# Altium PCB PCB1.PcbDoc
Units mm, origin at the board's own origin, x right, y up, seen from the top; angles counter-clockwise.
Board outline 86 x 53 mm, 2 copper layers (Top Layer, Bottom Layer); 32 components, 26 nets, 111 pads, 0 vias.
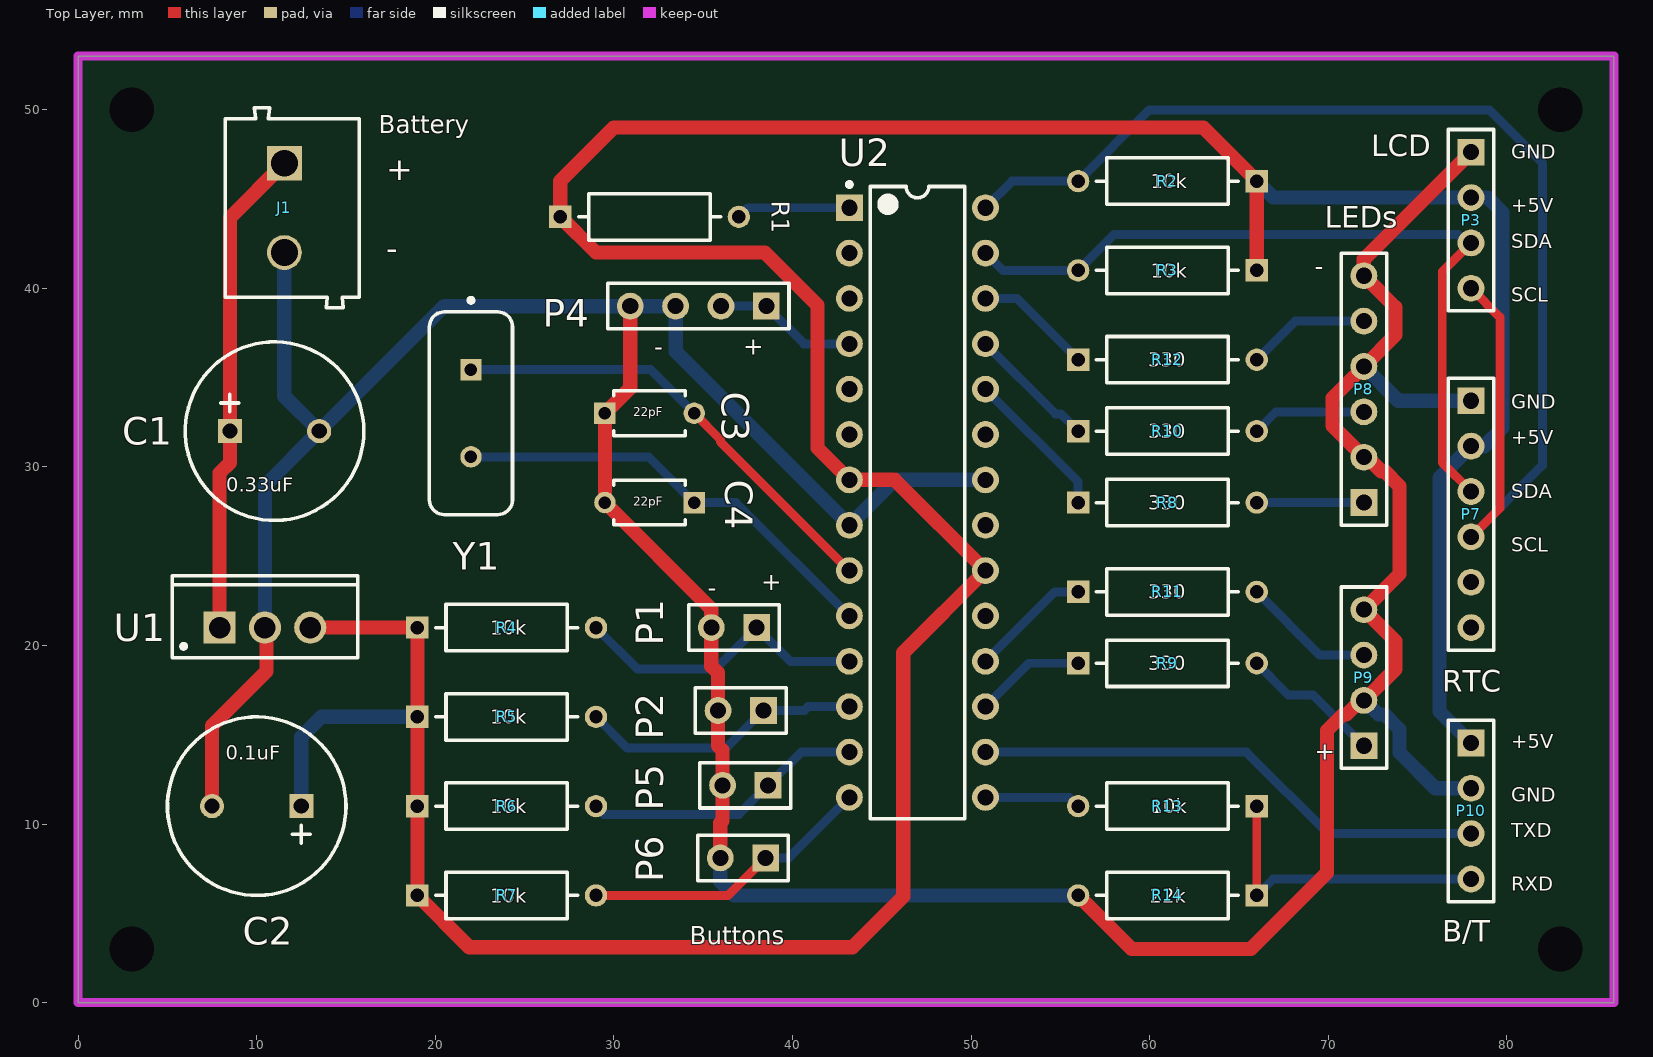
[diagram p0: Top Layer view]
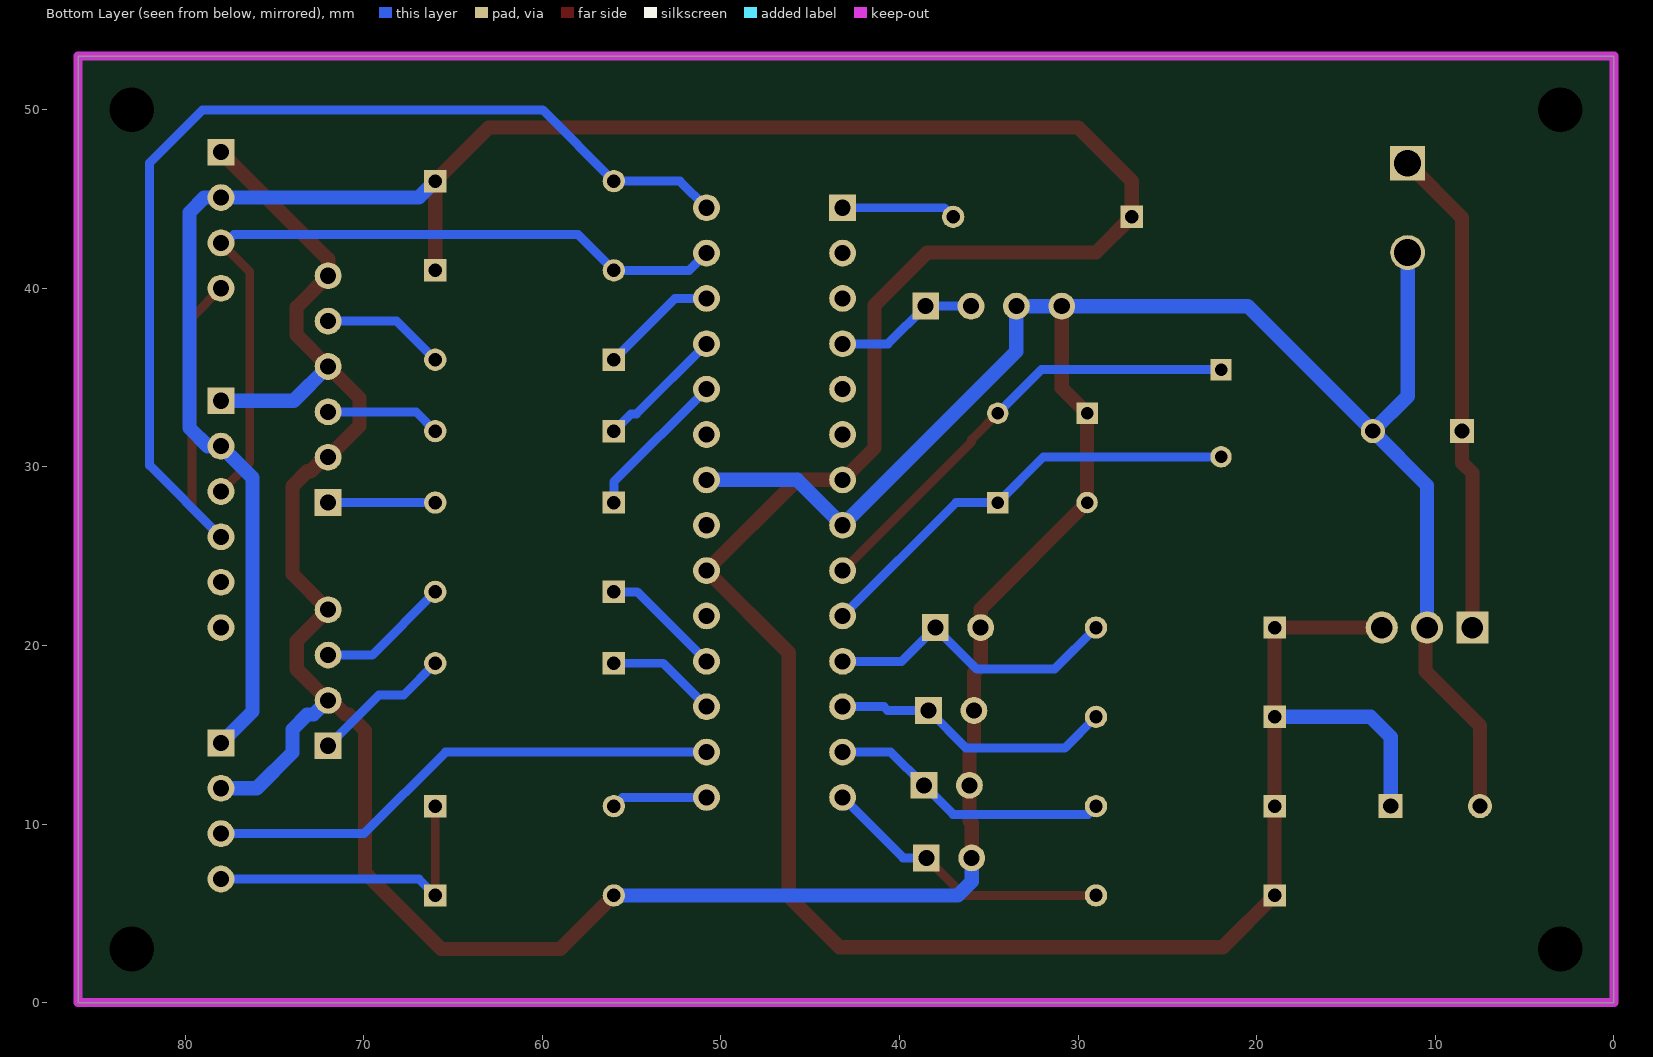
[diagram p1: Bottom Layer view, seen from below]
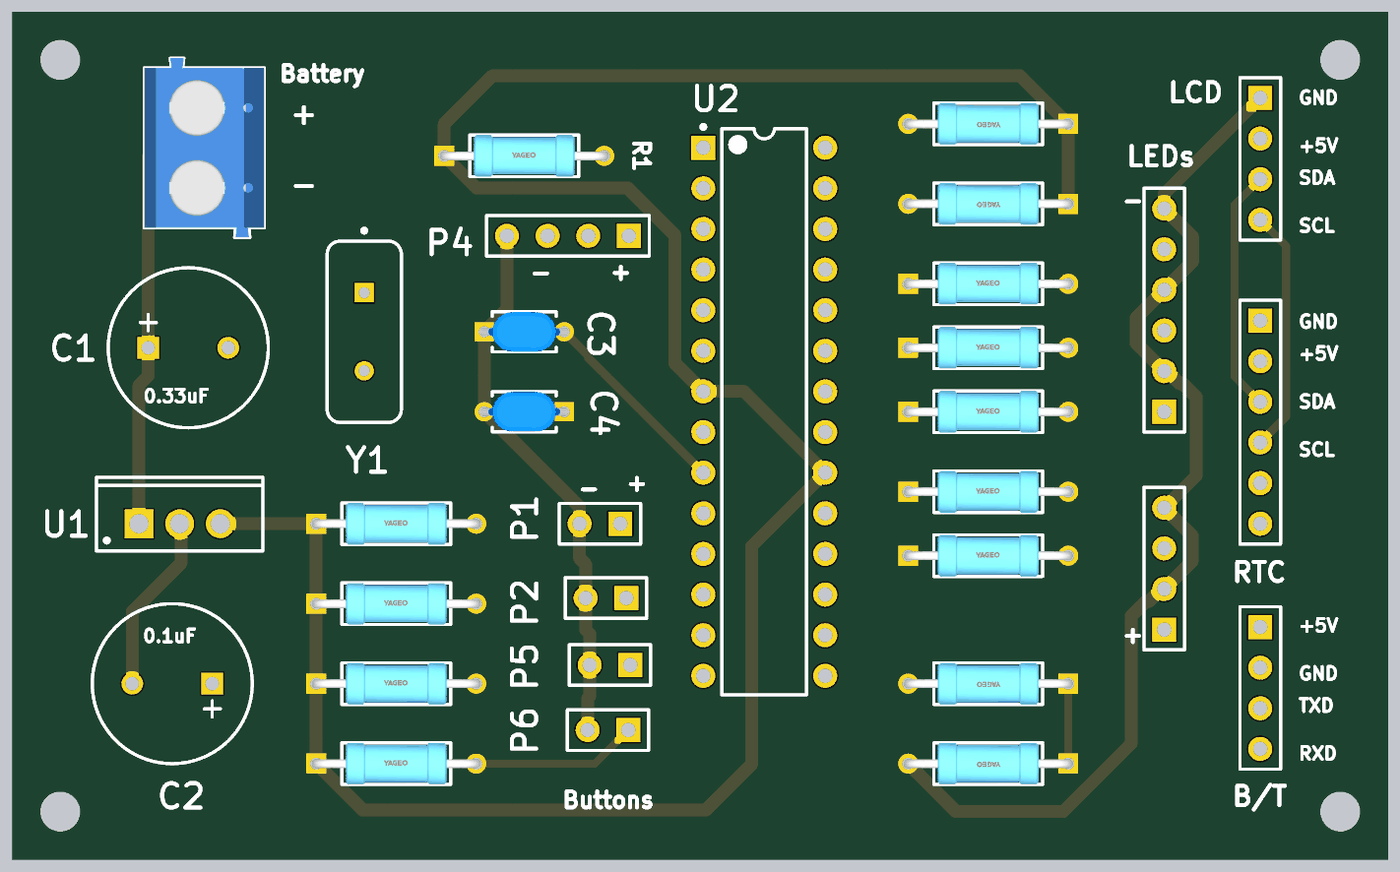
[diagram p2: 3D render of the assembled board from above, using the file's embedded part models]

## Layer stack, top to bottom
Top Solder: solder mask 0.0102, Solder Resist, Dk 3.5
Top Layer: signal copper 0.0356
Dielectric 1: dielectric 0.32, FR-4, Dk 4.8
Bottom Layer: signal copper 0.0356
Bottom Solder: solder mask 0.0102, Solder Resist, Dk 3.5

## Board outline
0,0 86,0 86,53 0,53

## Design rules (kind name [scope] priority, off if disabled: settings)
Clearance [All] p1: gap=0.6 ignorepadtopadclearanceinfootprint=FALSE
HoleSize [All] p1: absolutevalues=TRUE maxlimit=2.54 minlimit=0.7 maxpercent=80.000 minpercent=20.000
PolygonConnect [All] p1: connectstyle=Relief reliefconductorwidth=0.254 reliefentries=4 polygonreliefangle="90 Angle" airgapwidth=0.254
RoutingVias [All] p1: holewidth=0.711 width=1.27 viastyle="Through Hole" minholewidth=0.711 minwidth=1.27 maxholewidth=0.711 maxwidth=1.27
SolderMaskExpansion [All] p1: expansion=0.102 istentingtop=FALSE
Width Width_1 [InNet('+5V') or InNet('GND')] p1: maxlimit=2 minlimit=0.7 preferedwidth=0.8
Width [All] p2: maxlimit=2 minlimit=0.5 preferedwidth=0.5
29 further rules are at their usual default settings.

## Components (designator, comment, footprint, x,y, rotation, side; value= is the part's Value field where it differs from the comment)
C1 "0.33uF" NIC-PLF-10x13-2_V 11,32 r0 top
C2 "0.1uF" NIC-PLF-10x13-2_V 10,11 r180 top
C3 "22pF" FP-RDE0M1-MFG 32,33 r0 top
C4 "22pF" FP-RDE0M1-MFG 32,28 r180 top
J1 "Battery" 691102710002 12,44.5 r270 top
P1 "set_alarm button" HDR1X2 38,21 r180 top
P2 "down button" HDR1X2 38.375,16.355 r180 top
P3 "LCD" HDR1X4 78,47.62 r270 top
P4 "Buzzer" HDR1X4 38.54,39 r180 top
P5 "up button" HDR1X2 38.629,12.164 r180 top
P6 "set_time button" HDR1X2 38.502,8.1 r180 top
P7 "RTC" HDR1X6 78,33.7 r270 top
P8 "LEDs" HDR1X6 72,28 r90 top
P9 "LEDs" HDR1X4 72,14.38 r90 top
P10 "B/T" HDR1X4 78,14.54 r270 top
R1 "MFR-25FBF52-1K18" FP-MFR-25-MFG 32,44 r0 top value=10kΩ
R2 "10k" FP-MFR-25-MFG 61,46 r180 top value=10kΩ
R3 "10k" FP-MFR-25-MFG 61,41 r180 top value=10kΩ
R4 "10k" FP-MFR-25-MFG 24,21 r0 top value=10kΩ
R5 "10k" FP-MFR-25-MFG 24,16 r0 top value=10kΩ
R6 "10k" FP-MFR-25-MFG 24,11 r0 top value=10kΩ
R7 "10k" FP-MFR-25-MFG 24,6 r0 top value=10kΩ
R8 "330" FP-MFR-25-MFG 61,28 r0 top value=330Ω
R9 "330" FP-MFR-25-MFG 61,19 r0 top value=330Ω
R10 "330" FP-MFR-25-MFG 61,32 r0 top value=330Ω
R11 "330" FP-MFR-25-MFG 61,23 r0 top value=330Ω
R12 "330" FP-MFR-25-MFG 61,36 r0 top value=330Ω
R13 "10k" FP-MFR-25-MFG 61,11 r180 top value=10kΩ
R14 "22k" FP-MFR-25-MFG 61,6 r180 top value=22kΩ
U1 "L7805CP" TO220FP 10.46,21 r0 top
U2 "ATmega328P-PU" 28P3 47,28 r0 top
Y1 "16 MHz" FOX-FOXSLF160-20 22,33 r270 top

## Footprints (in the part's own frame and the unit in brackets; to place one, negate y for a bottom-side part, rotate by r counter-clockwise, add the part's x,y. Pads: shape width x height; smd on the part's side, far side on the other; paste and mask are expansions set on the pad)
28P3 [mm] "28-Pin Plastic Dual In-Line Package (PDIP)"
  rect 1.5x1.5 hole 0.9: 1(-3.81,16.51)
  round 1.5 hole 0.9: 2(-3.81,13.97) 3(-3.81,11.43) 4(-3.81,8.89) 5(-3.81,6.35) 6(-3.81,3.81) 7(-3.81,1.27) 8(-3.81,-1.27) 9(-3.81,-3.81) 10(-3.81,-6.35) 11(-3.81,-8.89) 12(-3.81,-11.43) 13(-3.81,-13.97) 14(-3.81,-16.51) 15(3.81,-16.51) 16(3.81,-13.97) 17(3.81,-11.43) 18(3.81,-8.89) 19(3.81,-6.35) 20(3.81,-3.81) 21(3.81,-1.27) 22(3.81,1.27) 23(3.81,3.81) 24(3.81,6.35) 25(3.81,8.89) 26(3.81,11.43) 27(3.81,13.97) 28(3.81,16.51)
  silkscreen extent -3.93,-17.7 2.65,17.93, body extent -3.6,-17.65 3.6,17.65, height 4.58
691102710002 [mm] "5,00mm - modular - blue - Horizontal entry with pressure clamp - 9,9 mm height - 02p"
  rect 1.95x1.95 hole 1.5: 1(-2.5,-0.45)
  round 1.95 hole 1.5: 2(2.5,-0.45)
  silkscreen extent -5.6,-3.75 5.6,3.75, body extent -5.6,-3.75 5.6,3.75, height 9.96
FOX-FOXSLF160-20 [mm] "THD, 2-Leads, Body 11.35x4.65mm"
  rect 1.2x1.2 hole 0.7: 1(-2.44,0)
  round 1.2 hole 0.7: 2(2.44,0)
  silkscreen extent -6.45,-2.32 5.68,2.32, body extent -5.67,-2.32 5.68,2.33, height 3.6
FP-MFR-25-MFG [mm]
  rect 1.25x1.25 hole 0.75 paste-1000 mask+0: 1(-5,0)
  round 1.25 hole 0.75 paste-1000 mask+0: 2(5,0)
  silkscreen extent -3.97,-1.3 3.98,1.3, body extent -5.72,-1.4 5.72,1.4, height 0.25
FP-RDE0M1-MFG [mm]
  rect 1.2x1.2 hole 0.7 paste-1000 mask+0: 1(-2.5,0)
  round 1.2 hole 0.7 paste-1000 mask+0: 2(2.5,0)
  silkscreen extent -2,-1.25 2,1.25, body extent -3.2,-1.35 3.2,1.35, height 0.25
HDR1X2 [mm] "Connector; Header; 2 Position"
  rect 1.5x1.5 hole 0.9: 1(0,0)
  round 1.5 hole 0.9: 2(2.54,0)
  silkscreen extent -1.27,-1.27 3.81,1.27
HDR1X4 [mm] "Connector; Header; 4 Position"
  rect 1.5x1.5 hole 0.9: 1(0,0)
  round 1.5 hole 0.9: 2(2.54,0) 3(5.08,0) 4(7.62,0)
  silkscreen extent -1.27,-1.27 8.89,1.27
HDR1X6 [mm] "Connector; Header; 6 Position"
  rect 1.5x1.5 hole 0.9: 1(0,0)
  round 1.5 hole 0.9: 2(2.54,0) 3(5.08,0) 4(7.62,0) 5(10.16,0) 6(12.7,0)
  silkscreen extent -1.27,-1.27 13.97,1.27
NIC-PLF-10x13-2_V [mm] "THD, 2-Leads, Dia 10mm, Body Length 12.5mm, Pin Spacing 5mm"
  rect 1.35x1.35 hole 0.85: 1(-2.5,0)
  round 1.35 hole 0.85: 2(2.5,0)
  silkscreen extent -5,-5 5,5, body extent -5,-5 5,5, height 13
TO220FP [mm] "TO, Thru-Hole, Vertical, Heatsink Mounted; 3 In-Line Leads; Pitch 2.54 mm"
  rect 1.8x1.8 hole 1.2: 1(-2.54,0)
  round 1.8 hole 1.2: 2(0,0) 3(2.54,0)
  silkscreen extent -5.2,-1.7 5.2,2.9, body extent -5.25,-1.75 5.25,2.95, height 20

## Part data
C1: library part CMP-1234-00001-1, "Aluminum Electrolytic Capacitor, 470 uF +/-20%, 10 V, -55 to 105 degC, 2-Pin THD, RoHS", Capacitance Tolerance=+/-20%, Leakage Current="0.94 mA", Manufacturer=Nichicon, PartNumber=PLF1A471MDO1, Rated Capacitance="0.33 uF", Rated Voltage="10 V", Temperature Range="-55 to 105 degC", ComponentLink1Description="Manufacturer URL", ComponentLink1URL=http://www.nichicon.co.jp/, ComponentLink2Description=Datasheet, ComponentLink2URL=http://nichicon-us.com/english/products/pdfs/e-lf.pdf, ComponentLink3Description="Package Specification", ComponentLink3URL=http://nichicon-us.com/english/products/pdfs/e-lf.pdf, DatasheetVersion=Sep-13, Mounting Technology="Through Hole", PackageDescription="2-Pin Through Hole Device, Dia 10 mm, Body Length 13 mm, Pin Spacing 5 mm", Rated Ripple="5700 mA", RoHS=TRUE
C2: library part CMP-1234-00001-1, "Aluminum Electrolytic Capacitor, 470 uF +/-20%, 10 V, -55 to 105 degC, 2-Pin THD, RoHS", Capacitance Tolerance=+/-20%, Leakage Current="0.94 mA", Manufacturer=Nichicon, PartNumber=PLF1A471MDO1, Rated Capacitance="0.1 uF", Rated Voltage="10 V", Temperature Range="-55 to 105 degC", ComponentLink1Description="Manufacturer URL", ComponentLink1URL=http://www.nichicon.co.jp/, ComponentLink2Description=Datasheet, ComponentLink2URL=http://nichicon-us.com/english/products/pdfs/e-lf.pdf, ComponentLink3Description="Package Specification", ComponentLink3URL=http://nichicon-us.com/english/products/pdfs/e-lf.pdf, DatasheetVersion=Sep-13, Mounting Technology="Through Hole", PackageDescription="2-Pin Through Hole Device, Dia 10 mm, Body Length 13 mm, Pin Spacing 5 mm", Rated Ripple="5700 mA", RoHS=TRUE
C3 C4: library part CMP-06035-055552-1, "Ceramic Capacitor 22pF ±5% 50V C0G Radial", Case/Package=Radial, Dielectric=C0G, Max Operating Temperature=125°C, Min Operating Temperature=-55°C, Package Quantity=500, Resistor Type=Ceramic, Tolerance=5%, Voltage Rating=50V, Capacitance=22pF, Height=3.5mm, Height - Seated (Max)=0.236inch, Lead Diameter=0.5mm, Lead Free="Lead Free", Lead Pitch=0.197inch, Length=0.157inch, Mount="Through Hole", Packaging=Bulk, Termination=Radial, Voltage Rating (DC)=50V, Width=0.098inch
J1: library part CMP-1502-03258-1, "Series 102 - 5.00 mm Horizontal Entry Modular with Pressure Clamp WR-TBL, 2 pin", Manufacturer="Wurth Elektronik", Operating Temperature=-40to105degC, Package Reference=691102710002, Datasheet URL=http://katalog.we-online.de/em/datasheet/6911027100xx.pdf, Manufacturer URL=http://www.we-online.de, Mounting Technology=THT, Packaging=Box, Part Number=691102710002, Pin Number=2, Pitch=5.00mm, Publisher=WurthElektronik
P1 P2 P5 P6: library part "Header 2", "Header, 2-Pin", LatestRevisionDate=17-Jul-2002, LatestRevisionNote="Re-released for DXP Platform.", Publisher="Altium Limited"
P3 P4 P9 P10: library part "Header 4", "Header, 4-Pin", LatestRevisionDate=17-Jul-2002, LatestRevisionNote="Re-released for DXP Platform.", Publisher="Altium Limited"
P7 P8: library part "Header 6", "Header, 6-Pin", LatestRevisionDate=17-Jul-2002, LatestRevisionNote="Re-released for DXP Platform.", Publisher="Altium Limited"
R1: library part CMP-03413-000001-1, "RES 1.18K OHM 1/4W 1% AXIAL", Manufacturer=Yageo, Package=MFR-25, Power Rating=0.25W, Resistance=10kΩ, Temperature="-55°C to +155°C", Temperature Coefficient=100ppm/°C, Temperature Range High=+155°C, Temperature Range Low=-55°C, Tolerance=1%, Voltage Rating=250V, Automotive=No, Category=Res, ComponentLink2Description=Datasheet, ComponentLink2URL=https://www.yageo.com/upload/media/product/products/datasheet/lr/Yageo_LR_MFR_1.pdf, Composition="Metal Film", Device Class L1="Passive Components", Device Class L2=Resistors, Device Class L3="Through-Hole Resistors", Digikey Description="RES 1.18K OHM 1/4W 1% AXIAL", Height=2.6mm, Ipc Land Pattern Name=RESAD1000W75L680D260, Lead Free=Yes, Manufacturer Part Number=MFR-25FBF52-1K18, Mouser Description="Metal Film Resistors 1.18K OHM 1/4W 1%", Octopart=https://octopart.com/mfr-25fbf52-1k18-yageo-56251681, RoHS=TRUE, Series=MFR
R2 R3 R4 R5 R6 R7 R13: library part CMP-03413-000001-1, "RES 1.18K OHM 1/4W 1% AXIAL", Manufacturer=Yageo, Manufacturer Part Number=MFR-25FBF52-1K18, Package=MFR-25, Power Rating=0.25W, Resistance=10kΩ, Temperature="-55°C to +155°C", Temperature Coefficient=100ppm/°C, Temperature Range High=+155°C, Temperature Range Low=-55°C, Tolerance=1%, Voltage Rating=250V, Automotive=No, Category=Res, ComponentLink2Description=Datasheet, ComponentLink2URL=https://www.yageo.com/upload/media/product/products/datasheet/lr/Yageo_LR_MFR_1.pdf, Composition="Metal Film", Device Class L1="Passive Components", Device Class L2=Resistors, Device Class L3="Through-Hole Resistors", Digikey Description="RES 1.18K OHM 1/4W 1% AXIAL", Height=2.6mm, Ipc Land Pattern Name=RESAD1000W75L680D260, Lead Free=Yes, Mouser Description="Metal Film Resistors 1.18K OHM 1/4W 1%", Octopart=https://octopart.com/mfr-25fbf52-1k18-yageo-56251681, RoHS=TRUE, Series=MFR
R8 R9 R10 R11 R12: library part CMP-03413-000001-1, "RES 1.18K OHM 1/4W 1% AXIAL", Manufacturer=Yageo, Manufacturer Part Number=MFR-25FBF52-1K18, Package=MFR-25, Power Rating=0.25W, Resistance=330Ω, Temperature="-55°C to +155°C", Temperature Coefficient=100ppm/°C, Temperature Range High=+155°C, Temperature Range Low=-55°C, Tolerance=1%, Voltage Rating=250V, Automotive=No, Category=Res, ComponentLink2Description=Datasheet, ComponentLink2URL=https://www.yageo.com/upload/media/product/products/datasheet/lr/Yageo_LR_MFR_1.pdf, Composition="Metal Film", Device Class L1="Passive Components", Device Class L2=Resistors, Device Class L3="Through-Hole Resistors", Digikey Description="RES 1.18K OHM 1/4W 1% AXIAL", Height=2.6mm, Ipc Land Pattern Name=RESAD1000W75L680D260, Lead Free=Yes, Mouser Description="Metal Film Resistors 1.18K OHM 1/4W 1%", Octopart=https://octopart.com/mfr-25fbf52-1k18-yageo-56251681, RoHS=TRUE, Series=MFR
R14: library part CMP-03413-000001-1, "RES 1.18K OHM 1/4W 1% AXIAL", Manufacturer=Yageo, Manufacturer Part Number=MFR-25FBF52-1K18, Package=MFR-25, Power Rating=0.25W, Resistance=22kΩ, Temperature="-55°C to +155°C", Temperature Coefficient=100ppm/°C, Temperature Range High=+155°C, Temperature Range Low=-55°C, Tolerance=1%, Voltage Rating=250V, Automotive=No, Category=Res, ComponentLink2Description=Datasheet, ComponentLink2URL=https://www.yageo.com/upload/media/product/products/datasheet/lr/Yageo_LR_MFR_1.pdf, Composition="Metal Film", Device Class L1="Passive Components", Device Class L2=Resistors, Device Class L3="Through-Hole Resistors", Digikey Description="RES 1.18K OHM 1/4W 1% AXIAL", Height=2.6mm, Ipc Land Pattern Name=RESAD1000W75L680D260, Lead Free=Yes, Mouser Description="Metal Film Resistors 1.18K OHM 1/4W 1%", Octopart=https://octopart.com/mfr-25fbf52-1k18-yageo-56251681, RoHS=TRUE, Series=MFR
U1: library part CMP-0244-00474-1, "Positive Voltage Regulator, 5V, 3-Pin TO-220FP", ComponentLink1Description="Manufacturer URL", ComponentLink1URL=http://www.st.com, ComponentLink2Description=Datasheet, ComponentLink2URL=http://www.st.com/internet/com/TECHNICAL_RESOURCES/TECHNICAL_LITERATURE/DATASHEET/CD00000444.pdf, DatasheetVersion=16/11/2011, PackageDescription="TO, Thru-Hole, Vertical, Heatsink Mounted; 3 In-Line Leads; Pitch 2.54 mm", PackageReference=TO220FP, PackageVersion=2011
U2: library part CMP-0095-00013-2, "8-bit AVR Microcontroller, 32KB Flash, 1KB EEPROM, 2KB SRAM, 28-pin PDIP, Industrial Grade (-40°C to 85°C)", ComponentLink1Description="Manufacturer URL", ComponentLink1URL=http://www.atmel.com/, ComponentLink2Description="ATmega48A/48PA/88A/88PA/168A/168PA/328/328P Datasheet", ComponentLink2URL=http://www.atmel.com/dyn/resources/prod_documents/8271.pdf, ComponentLink3Description="ATmega48A/48PA/88A/88PA/168A/168PA/328/328P Summary", ComponentLink3URL=http://www.atmel.com/dyn/resources/prod_documents/8271S.pdf, DatasheetVersion="revD, May-2011", PackageDescription="28-lead (0.300\"/7.62mm Wide) Plastic Dual Inline Package (PDIP)", PackageReference=28P3, PackageVersion="revB, Sep-2001", RevisionNote="DatasheetVersion updated. URLs added."
Y1: library part CMP-1749-00003-1, "Resistance Weld Thru-Hole Crystal, 16 MHz, -20 to 70 degC, 2-Pin THD, RoHS, Bulk", Case\Package=Axial, Max Operating Temperature="155 degC", Min Operating Temperature="-55 degC", Package Quantity=200, Power Rating="250 mW", Resistance="221 kohm", Tolerance=1%, Voltage Rating="250 V", ComponentLink1Description="Manufacturer URL", ComponentLink1URL=http://www.foxonline.com/, ComponentLink2Description=Datasheet, ComponentLink2URL=http://www.foxonline.com/pdfs/hc49slf.pdf, DatasheetVersion=Mar-15, Length="0.248 inch", Mount="Through Hole", PackageDescription="2-Pin Through Hole Device, Body 11.35 x 4.65 mm", PackageReference=FOXSLF160-20, Packaging=Bulk, RoHSCompliant=true

## Free pads (board coordinates)
  round 0 hole 2.5 unplated: 8(83,50) 9(83,3) 10(3,3) 11(3,50)

## Nets (pads, with @x,y where several pads share a name; then routed paths per layer and width w, separated by ;. In a path a pad name is that pad's centre, name@x,y a point inside that pad or via, vN(x,y) a via of type N, cw(c..) or ccw(c..) an arc to the next point about the centre after c; other vN are vias at no path point)
+5V: C2.1 P3.2 P7.2 P10.1 R1.1 R2.1 R3.1 R4.1 R5.1 R6.1 R7.1 U1.3 U2.7 U2.20 | length 213.6
  Top Layer w0.8: U1.3 R4.1 R5.1 R6.1 R7.1 21.901,3.099 43.36,3.099 46.205,5.944 46.205,19.585 U2.20 45.73,29.27 U2.7 41.404,31.056 41.404,39.05 38.454,42 29,42 R1.1 27,46 30,49 63,49 R2.1 R3.1
  Bottom Layer w0.8: C2.1 12.5,14.875 13.625,16 R5.1 ; R2.1 66.92,45.08 P3.2 78.932,45.08 79.765,44.247 79.765,32.182 78.743,31.16 P7.2 76.234,29.394 76.234,16.306 P10.1
A1: R8.1 U2.24 | length 8.5
  Bottom Layer w0.5: U2.24 56,29.16 R8.1
A2: R10.1 U2.25 | length 7.2
  Bottom Layer w0.5: U2.25 54.731,32.969 55.031,32.969 R10.1
A3: R12.1 U2.26 | length 6.6
  Bottom Layer w0.5: U2.26 52.57,39.43 R12.1
A4: P3.3 P7.3 R3.2 U2.27 | length 43.9
  Top Layer w0.5: P7.3 76.387,30.233 76.387,40.927 P3.3
  Bottom Layer w0.5: U2.27 51.78,41 R3.2 58,43 77.269,43 77.729,42.54 P3.3
A5: P3.4 P7.4 R2.2 U2.28 | length 72.5
  Top Layer w0.5: P7.4 79.612,27.692 79.612,38.388 P3.4
  Bottom Layer w0.5: U2.28 52.3,46 R2.2 59.987,49.987 79.028,49.987 82,47.016 82,30.08 P7.4
D2: P4.1 P4.2 U2.4 | length 8.1
  Bottom Layer w0.5: P4.2 P4.1 40.65,36.89 U2.4
D5: P1.1 R4.2 U2.11 | length 16.9
  Bottom Layer w0.5: R4.2 31.331,18.669 35.669,18.669 P1.1 39.89,19.11 U2.11
D6: P2.1 R5.2 U2.12 | length 15.9
  Bottom Layer w0.5: R5.2 30.75,14.25 36.27,14.25 P2.1 40.668,16.355 40.883,16.57 U2.12
D7: P5.1 R6.2 U2.13 | length 15.8
  Bottom Layer w0.5: R6.2 29.459,10.541 37.006,10.541 P5.1 40.495,14.03 U2.13
D8: P6.1 R7.2 U2.14 | length 16.5
  Top Layer w0.5: R7.2 36.402,6 P6.1
  Bottom Layer w0.5: P6.1 39.8,8.1 U2.14
D9: R13.2 U2.15 | length 5.4
  Bottom Layer w0.5: U2.15 55.51,11.49 R13.2
D10: P10.3 U2.16 | length 29.1
  Bottom Layer w0.5: U2.16 65.422,14.03 69.992,9.46 P10.3
D11: R9.1 U2.17 | length 6.2
  Bottom Layer w0.5: U2.17 53.24,19 R9.1
D12: R11.1 U2.18 | length 6.8
  Bottom Layer w0.5: U2.18 54.7,23 R11.1
GND: C1.2 C2.2 C3.1 C4.2 J1.2 P1.2 P2.2 P3.1 P4.3 P4.4 P5.2 P6.2 P7.1 P8.2 P8.4 P8.6 P9.2 P9.4 P10.2 R14.2 U1.2 U2.8 U2.22 | length 220.8
  Top Layer w0.8: C2.2 7.5,15.5 10.548,18.548 10.548,20.912 U1.2 ; P4.4 30.92,34.42 C3.1 C4.2 35.46,22.04 P1.2 35.46,18.841 35.835,18.466 P2.2 35.835,14.377 36.089,14.123 P5.2 36.089,10.186 35.962,10.059 P6.2 ; R14.2 59,3 65.664,3 69.937,7.273 69.937,15.232 70.836,16.13 71.021,16.13 71.811,16.92 P9.2 73.75,18.67 73.75,20.25 P9.4 74,24 74,28.914 73.164,29.75 72.979,29.75 72.189,30.54 P8.2 70.24,32.3 70.24,33.86 P8.4 73.77,37.39 73.77,38.93 P8.6 72,41.62 P3.1
  Bottom Layer w0.8: U1.2 10.46,28.96 C1.2 ; J1.2 11.55,33.95 C1.2 ; P6.2 35.962,6.782 36.744,6 R14.2 ; U2.22 45.73,29.27 U2.8 33.46,36.46 P4.3 P4.4 20.5,39 C1.2 ; P9.2 72.029,16.92 72.819,16.13 73.164,16.13 74,15.294 74,14 76,12 P10.2 ; P8.4 73.92,33.7 P7.1
NetC1_1: C1.1 J1.1 U1.1 | length 27.5
  Top Layer w0.8: U1.1 7.92,29.656 8.5,30.236 C1.1 8.5,43.95 J1.1
NetC3_2: C3.2 U2.9 Y1.1 | length 25.9
  Top Layer w0.5: C3.2 35.969,31.531 35.969,31.411 U2.9
  Bottom Layer w0.5: Y1.1 32.06,35.44 C3.2
NetC4_1: C4.1 U2.10 Y1.2 | length 24.9
  Bottom Layer w0.5: Y1.2 31.94,30.56 C4.1 36.84,28 U2.10
NetP8_1: P8.1 R8.2 | length 6
  Bottom Layer w0.5: R8.2 P8.1
NetP8_3: P8.3 R10.2 | length 6.4
  Bottom Layer w0.5: R10.2 67.08,33.08 P8.3
NetP8_5: P8.5 R12.2 | length 6.9
  Bottom Layer w0.5: R12.2 68.16,38.16 P8.5
NetP9_1: P9.1 R9.2 | length 7.9
  Bottom Layer w0.5: R9.2 67.779,17.221 69.159,17.221 P9.1
NetP9_3: P9.3 R11.2 | length 7.5
  Bottom Layer w0.5: R11.2 69.54,19.46 P9.3
NetP10_4: P10.4 R13.1 R14.1 | length 17.4
  Top Layer w0.5: R14.1 R13.1
  Bottom Layer w0.5: R14.1 66.92,6.92 P10.4
RST: R1.2 U2.1 | length 6.4
  Bottom Layer w0.5: R1.2 37.51,44.51 U2.1
pads on no net: P7.5 P7.6 U2.2 U2.3 U2.5 U2.6 U2.19 U2.21 U2.23

## Keep-outs
Keep-Out Layer:
  the board outline again, w0.5

## Silkscreen, mask and mechanical layers (free items; w line width, h text height)
Top Overlay:
  text "GND" at 80.254,47.254 h0.8
  text "+" at 17.254,46.037 h1.3
  text "+5V" at 80.254,44.254 h0.8
  text "SDA" at 80.254,42.254 h0.8
  text "-" at 17.254,41.604 h1.3
  text "-" at 69.254,40.754 h1
  text "SCL" at 80.254,39.254 h0.8
  text "+" at 37.254,36.287 h1
  text "-" at 32.254,36.254 h1
  text "GND" at 80.254,33.254 h0.8
  text "+5V" at 80.254,31.254 h0.8
  text "SDA" at 80.254,28.254 h0.8
  text "SCL" at 80.254,25.254 h0.8
  text "+" at 38.254,23.087 h1
  text "-" at 35.254,22.754 h1
  text "+5V" at 80.254,14.254 h0.8
  text "+" at 69.254,13.587 h1
  text "GND" at 80.254,11.254 h0.8
  text "TXD" at 80.254,9.254 h0.8
  text "RXD" at 80.254,6.254 h0.8
  text "Buttons" at 34.254,3.254 h1